# Altium PCB USBC_BREAKOUT.PcbDoc
Units mm, origin at the board's own origin, x right, y up, seen from the top; angles counter-clockwise.
Board outline 12.7 x 12.7 mm, 4 copper layers (Top Layer, Mid Layer 1, Mid Layer 2, Bottom Layer), stack 1.57 mm thick; 3 components, 8 nets, 46 pads, 12 vias.
Unrouted connection lines stored in the file: 2.
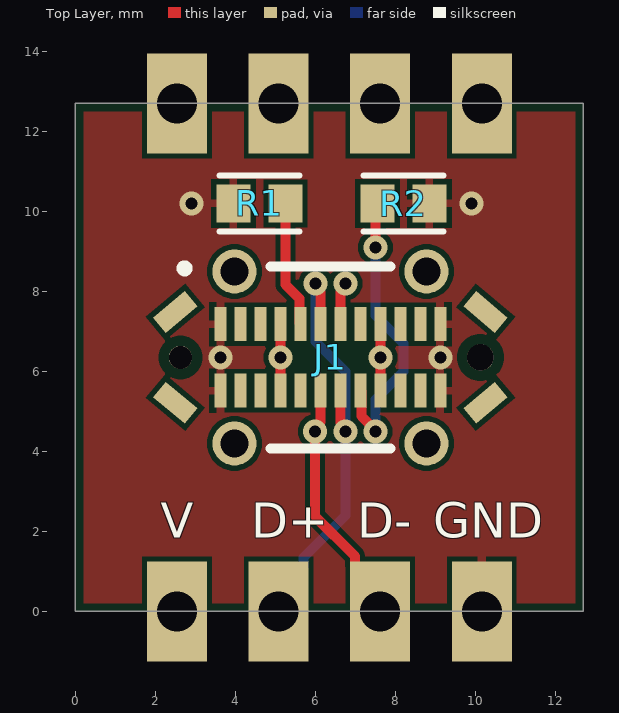
[diagram p0: Top Layer view]
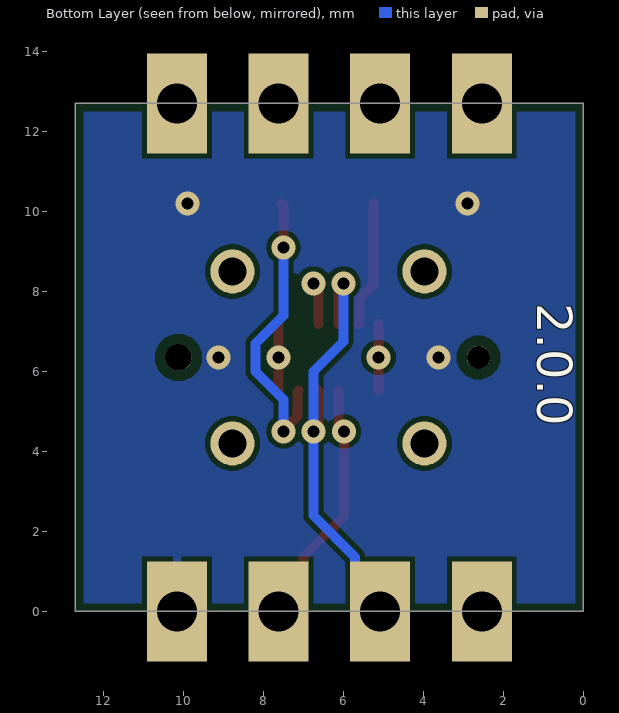
[diagram p1: Bottom Layer view, seen from below]
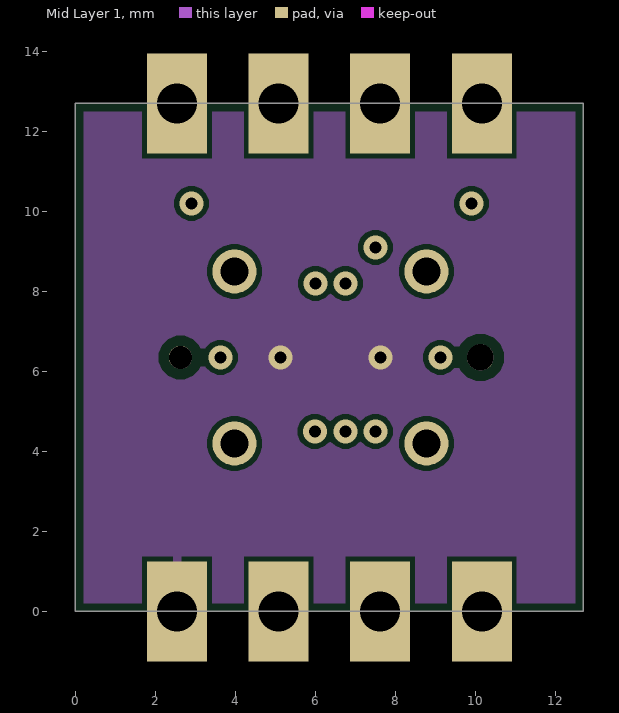
[diagram p2: Mid Layer 1]
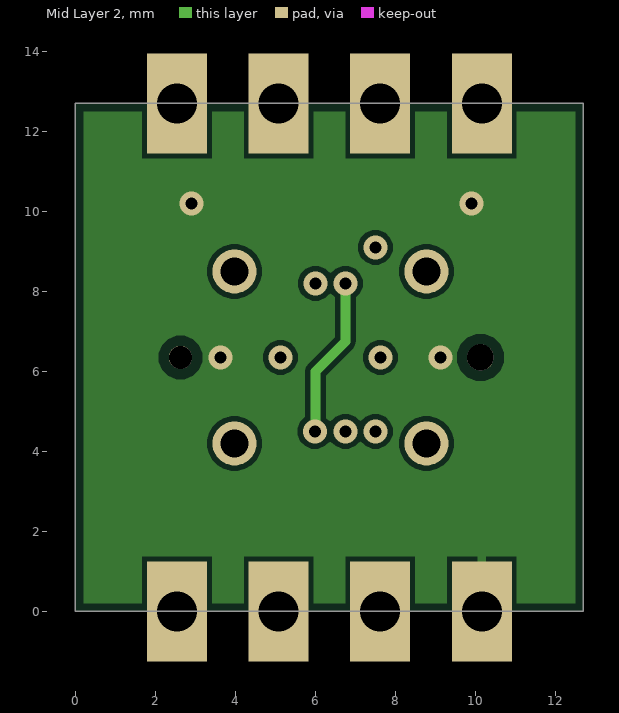
[diagram p3: Mid Layer 2]
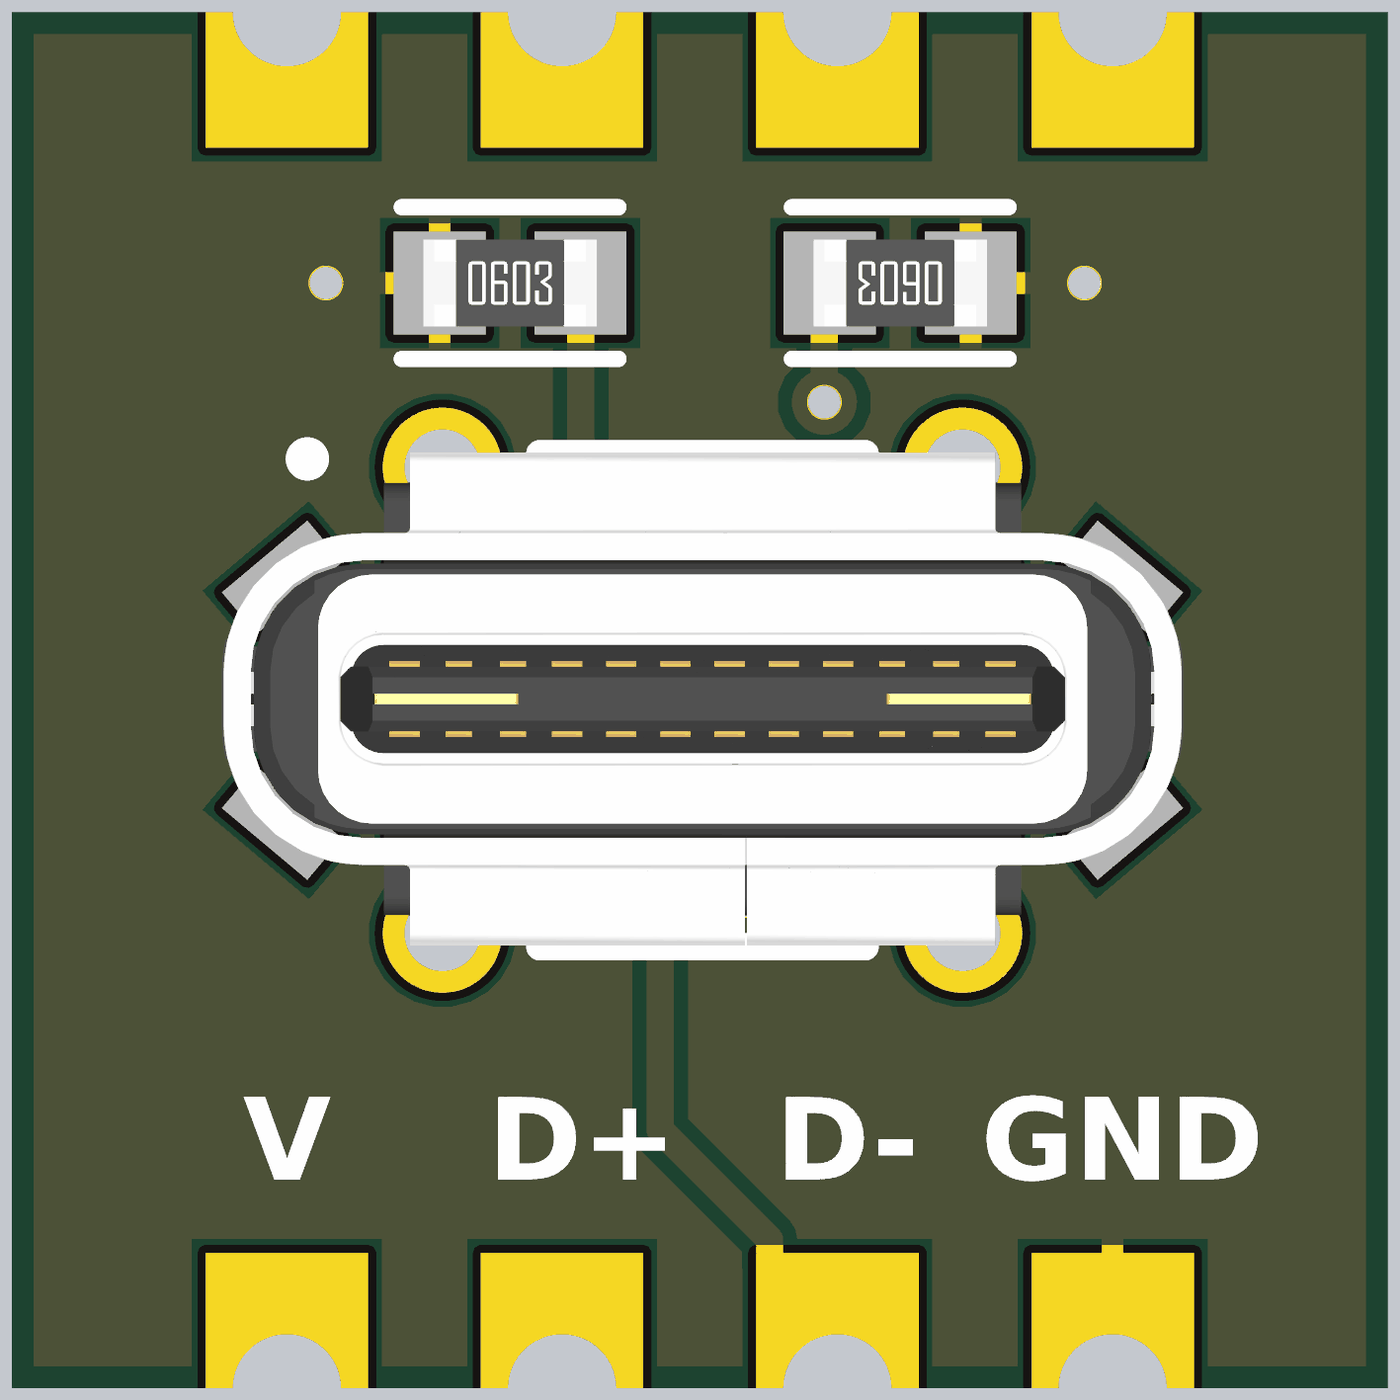
[diagram p4: 3D render of the assembled board from above, using the file's embedded part models]

## Layer stack, top to bottom
Top Solder: solder mask 0.0127, Solder Resist, Dk 3.8
Top Layer: signal copper 0.035
Dielectric 1: prepreg 0.2, 7628, Dk 4.6
Mid Layer 1: signal copper 0.0175
Core: core 1.065, FR-4, Dk 4.5
Mid Layer 2: signal copper 0.0175
Dielectric 2: prepreg 0.2, 7628, Dk 4.6
Bottom Layer: signal copper 0.035
Bottom Solder: solder mask 0.0127, Solder Resist, Dk 3.8

## Board outline
0,0 12.7,0 12.7,12.7 0,12.7

## Design rules (kind name [scope] priority, off if disabled: settings)
BoardOutlineClearance [All] p1: gap=0.2 ignorepadtopadclearanceinfootprint=FALSE
Clearance [All] p1: gap=0.127 ignorepadtopadclearanceinfootprint=FALSE except(0.25: Arc-Hole Track-Hole SMDPad-Hole THPad-Hole Via-Hole Fill-Hole Poly-Hole Region-Hole Text-Hole)
ComponentClearance [All] p1: gap=0.127 collisioncheckmode=3 verticalgap=0.127 showdistances=TRUE
DiffPairsRouting [All] p1: maxlimit=0.254 minlimit=0.127 mostfreqgap=0.254 toplayer_prefgap=0.127 toplayer_minwidth=0.127 toplayer_maxwidth=25.4 toplayer_prefwidth=0.127 midlayer1_mingap=0.254 midlayer1_minwidth=0.381 midlayer1_maxwidth=0.381 midlayer1_prefwidth=0.381 midlayer2_mingap=0.254 midlayer2_minwidth=0.381 midlayer2_maxwidth=0.381 midlayer2_prefwidth=0.381 bottomlayer_prefgap=0.127 bottomlayer_minwidth=0.127 bottomlayer_maxwidth=25.4 bottomlayer_prefwidth=0.127 maxuncoupledlength=12.7
Height [All] p1: minheight=0 maxheight=1816.048 prefheight=12.7
HoleSize [All] p1: absolutevalues=TRUE maxlimit=6.3 minlimit=0.3 maxpercent=80.000 minpercent=20.000
HoleToHoleClearance [All] p1: gap=0.25 allowstackedmicrovias=FALSE
MinimumAnnularRing [All] p1: minimumring=0.076
MinimumSolderMaskSliver [All] p1: minsoldermaskwidth=0
PlaneClearance [All] p1: clearance=0.127
PlaneConnect PlaneConnectPowerPads [InPadClass('PowerPads')] p1: planeconnectstyle=Direct reliefexpansion=0.508 reliefentries=4 reliefconductorwidth=0.254 reliefairgap=0.254
PlaneConnect [All] p2: pad.planeconnectstyle=Relief pad.reliefexpansion=0.3 pad.reliefentries=4 pad.reliefconductorwidth=0.127 pad.reliefairgap=0.127 via.planeconnectstyle=Direct via.reliefexpansion=0.3 via.reliefentries=4 via.reliefconductorwidth=0.127 via.reliefairgap=0.127
PolygonConnect PolygonConnectPowerPads [All vs (InPadClass('PowerPads'))] p1: connectstyle=Direct reliefconductorwidth=0.254 reliefentries=4 polygonreliefangle="90 Angle" airgapwidth=0.254
PolygonConnect [All] p2: thpad.connectstyle=Relief thpad.reliefconductorwidth=0.2 thpad.reliefentries=4 thpad.polygonreliefangle="90 Angle" thpad.airgapwidth=0.127 smdpad.connectstyle=Relief smdpad.reliefconductorwidth=0.2 smdpad.reliefentries=4 smdpad.polygonreliefangle="90 Angle" smdpad.airgapwidth=0.127 via.connectstyle=Direct via.reliefconductorwidth=0.127 via.reliefentries=4 via.polygonreliefangle="90 Angle" via.airgapwidth=0.127
RoutingVias [All] p1: holewidth=0.3 width=0.6 viastyle="Through Hole" minholewidth=0.3 minwidth=0.6 maxholewidth=0.6 maxwidth=6.6
SilkToSilkClearance [All] p1: silktosilkclearance=0
SilkToSolderMaskClearance [IsPad] p1: minsilkscreentomaskgap=0.127 clearancetoexposedcopper=TRUE
SolderMaskExpansion [All] p1: expansion=0.075 istentingtop=FALSE
SupplyNets "Schematic Supply Nets_6" [InNet('GND')] p1: voltage=0.000
Width [All] p1: maxlimit=25.4 minlimit=0.127 preferedwidth=0.127 minimp=50.000000 maximp=50.000000 favimp=50.000000
20 further rules are at their usual default settings.

## Components (designator, comment, footprint, x,y, rotation, side; value= is the part's Value field where it differs from the comment)
J1 "USB4070-30-C" GCT_USB4070-30-C_REVC5 6.375,6.35 r0 top
R1 "5.1 kOhms" "RES 0603_1608" 4.6,10.2 r0 top
R2 "5.1 kOhms" "RES 0603_1608" 8.2,10.2 r180 top

## Footprints (in the part's own frame and the unit in brackets; to place one, negate y for a bottom-side part, rotate by r counter-clockwise, add the part's x,y. Pads: shape width x height; smd on the part's side, far side on the other; paste and mask are expansions set on the pad)
GCT_USB4070-30-C_REVC5 [mm] "GCT_USB4070-30-C_REVC5"
  rect 0.3x0.85 smd: A1(-2.75,0.83) A2(-2.25,0.83) A3(-1.75,0.83) A4(-1.25,0.83) A5(-0.75,0.83) A6(-0.25,0.83) A7(0.25,0.83) A8(0.75,0.83) A9(1.25,0.83) A10(1.75,0.83) A11(2.25,0.83) A12(2.75,0.83) B1(2.75,-0.83) B2(2.25,-0.83) B3(1.75,-0.83) B4(1.25,-0.83) B5(0.75,-0.83) B6(0.25,-0.83) B7(-0.25,-0.83) B8(-0.75,-0.83) B9(-1.25,-0.83) B10(-1.75,-0.83) B11(-2.25,-0.83) B12(-2.75,-0.83)
  round 1.1 hole 0.7: S1(-2.4,2.15) S2(-2.4,-2.15) S3(2.4,2.15) S4(2.4,-2.15)
  rect 1.03x0.5 smd rot 40: S5(-3.88,1.135) S8(3.88,-1.135)
  rect 1.03x0.5 smd rot 140: S6(-3.88,-1.135) S7(3.88,1.135)
  round 0.58 hole 0.58 unplated: ""(-3.75,0)
  round 0.66 hole 0.66 unplated: ""(3.75,0)
  silkscreen extent -3.75,-2.27 1.5,2.33, body extent -4.43,-2.26 4.44,2.29, height 10.49
"RES 0603_1608" [mm] "Chip Resistor, 2-Leads, Body 1.60x0.80mm, IPC Medium Density"
  rect 0.85x0.95 smd: 1(-0.65,0) 2(0.65,0)
  silkscreen extent -1,-0.7 1,0.7, body extent -0.8,-0.4 0.8,0.4, height 0.45

## Part data
J1: "USB-C (USB TYPE-C) USB 3.2 Gen 2 (USB 3.1 Gen 2, Superspeed + (USB 3.1)) Receptacle Connector 24 Position Surface Mount, Through Hole", Package=None, Supplier Part Number 1=24AC9908, Availability="In Stock", Check_prices=https://www.snapeda.com/parts/USB4070-30-C/Global%20Connector%20Technology/view-part/1212974/?ref=eda, MF="Global Connector Technology", MP=USB4070-30-C, price=None, Purchase-URL=https://pricing.snapeda.com/search/part/USB4070-30-C/?ref=eda, SnapEDA_Link=https://www.snapeda.com/parts/USB4070-30-C/Global%20Connector%20Technology/view-part/1212974/?ref=snap, Supplier 1=Newark
R1 R2: library part CRCW06035K10FKEA, "RES SMD 5.1K OHM 1% 1/10W 0603", Device Package="0603 (1608 Metric)", manufacturer="Vishay Dale", Operating Temperature="-55°C ~ 155°C", Power (Watts)="0.1W, 1/10W", Ratings=AEC-Q200, Supplier Device Package=0603, Supplier Part Number 1=541-5.10KHCT-ND, Temperature Coefficient=±100ppm/°C, Tolerance=±1%, componentlink1description=Datasheet, componentlink1url=http://www.vishay.com/docs/20035/dcrcwe3.pdf, componentlink2description="DigiKey Link", componentlink2url=https://www.digikey.com/en/products/detail/vishay-dale/CRCW06035K10FKEA/1174748, Composition="Thick Film", Features="Automotive AEC-Q200", Height - Seated (Max)="0.020\" (0.50mm)", Lifecycle Status=Active, Minimum Order=1, Number of Terminations=2, Package / Case="0603 (1608 Metric)", packaging=TapeAndReel, Part Number=CRCW06035K10FKEA, Part Status=Active, partid=12590, price=0.01, Resistance="5.1 kOhms", series=CRCW, Size / Dimension="0.061\" L x 0.033\" W (1.55mm x 0.85mm)", Supplier 1=DigiKey
  R1: lastupdated="19/09/2022 13:22:05"
  R2: lastupdated="28/12/2022 21:08:01"

## Free pads (board coordinates)
  rect 1.5x2.5 hole 1: NC(2.54,12.7) NC(5.08,12.7) NC(7.62,12.7) NC(10.16,12.7) PAD1(2.54,0) PAD2(5.08,0) PAD3(7.62,0) PAD4(10.16,0)

## Via types
v1: diameter 0.6, hole 0.3, Top Layer to Bottom Layer, tented both sides, 12 vias

## Nets (pads, with @x,y where several pads share a name; then routed paths per layer and width w, separated by ;. In a path a pad name is that pad's centre, name@x,y a point inside that pad or via, vN(x,y) a via of type N, cw(c..) or ccw(c..) an arc to the next point about the centre after c; other vN are vias at no path point)
CC1: J1.A5 R1.2 | length 3.2
  Top Layer w0.25: R1.2 5.25,8.169 5.6,7.819 5.6,7.205 J1.A5
CC2: J1.B5 R2.2 | length 7.5
  Top Layer w0.25: J1.B5 7.15,5.495 7.15,4.881 7.5,4.531 v1(7.5,4.5) ; v1(7.5,9.1) 7.5,10.15 R2.2
  Bottom Layer w0.25: v1(7.5,4.5) 7.5,5.297 8.2,5.997 8.2,6.7 7.5,7.4 v1(7.5,9.1)
D+: J1.A6 J1.B6 pad.PAD2 | length 10.2
  Top Layer w0.25: v1(6,8.2) 6,8.105 6.125,7.98 J1.A6 ; J1.B6 6.625,4.72 6.75,4.595 v1(6.75,4.5)
  Bottom Layer w0.25: pad.PAD2@5.454,1.1 5.68,1.1 5.705,1.125 5.705,1.351 6.75,2.396 v1(6.75,4.5) 6.75,6 6,6.75 v1(6,8.2)
D-: J1.A7 J1.B7 pad.PAD3 | length 10.6
  Top Layer w0.25: J1.B7 6.125,4.735 5.985,4.595 5.985,2.382 6.995,1.371 6.995,1.125 7.02,1.1 pad.PAD3@7.62,1.1 ; J1.A7 6.625,7.98 6.75,8.105 v1(6.75,8.2)
  Mid Layer 2 w0.25: v1@5.985,4.515 6,4.531 6,6 6.75,6.75 v1(6.75,8.2)
  other v1: 5.985,4.5
GND: J1.A1 J1.A12 J1.B1 J1.B12 pad.PAD4 R1.1 R2.1
  other v1: 3.625,6.35 9.125,6.35 2.9,10.2 9.9,10.2
SBU1: J1.A8
SBU2: J1.B8
VBUS: J1.A4 J1.A9 J1.B4 J1.B9 pad.PAD1 | length 3.3
  Top Layer w0.25: J1.B9 v1(5.125,6.35) J1.A4 ; J1.B4 v1(7.625,6.35) J1.A9
pads on no net: J1. J1.A2 J1.A3 J1.A10 J1.A11 J1.B2 J1.B3 J1.B10 J1.B11 J1.S1 J1.S2 J1.S3 J1.S4 J1.S5 J1.S6 J1.S7 J1.S8

## Polygon pours and split planes (outlines as drawn)
VBUS on Mid Layer 1 "NONET_L-01_P-001" (solid, pour order 2): 0,0 12.7,0 12.7,12.7 0,12.7
GND on Mid Layer 2 "NONET_L-01_P-001" (solid, pour order 3): 0,0 12.7,0 12.7,12.7 0,12.7
GND on Bottom Layer "NONET_L-01_P-001" (solid, remove dead copper, pour order 1): 0,0 12.7,0 12.7,12.7 0,12.7
GND on Top Layer "NONET_L-01_P-001" (solid, pour order 0): 0,0 12.7,0 12.7,12.7 0,12.7

## Silkscreen, mask and mechanical layers (free items; w line width, h text height)
Top Overlay:
  text "V" at 2.136,1.55 h1.5
  text "D+" at 4.392,1.55 h1.5
  text "D-" at 7.048,1.55 h1.5
  text "GND" at 8.944,1.55 h1.5
Bottom Overlay:
  text "2.0.0" at 1.444,7.7 h1.5 r90
Mechanical 1:
  the board outline again, w0.25
  text ".Pcb_File_Name_No_Path" at 0,13.986 h1.52

## Dimensions
0,12.7 to 12.7,12.7 on Mechanical 15
12.7,12.7 to 12.7,0 on Mechanical 15